# EAGLE board featherwing (EAGLE 6.5.0)
REV: C
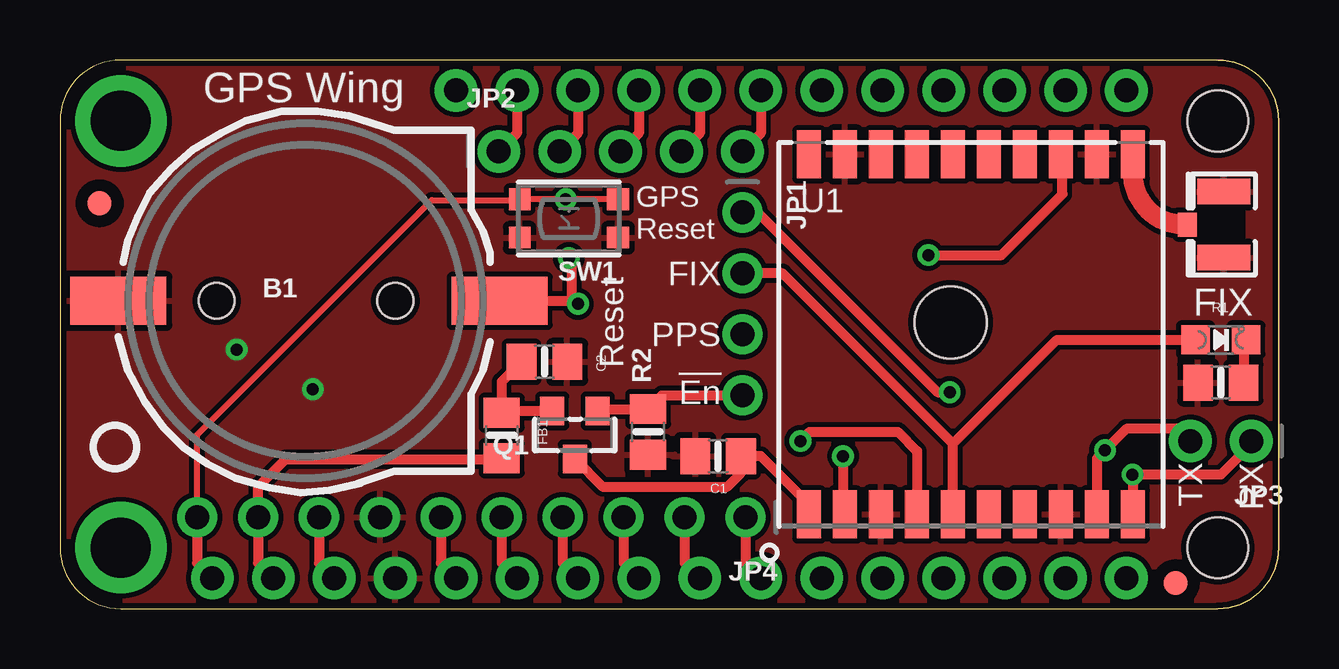
[diagram p0: board, top side]
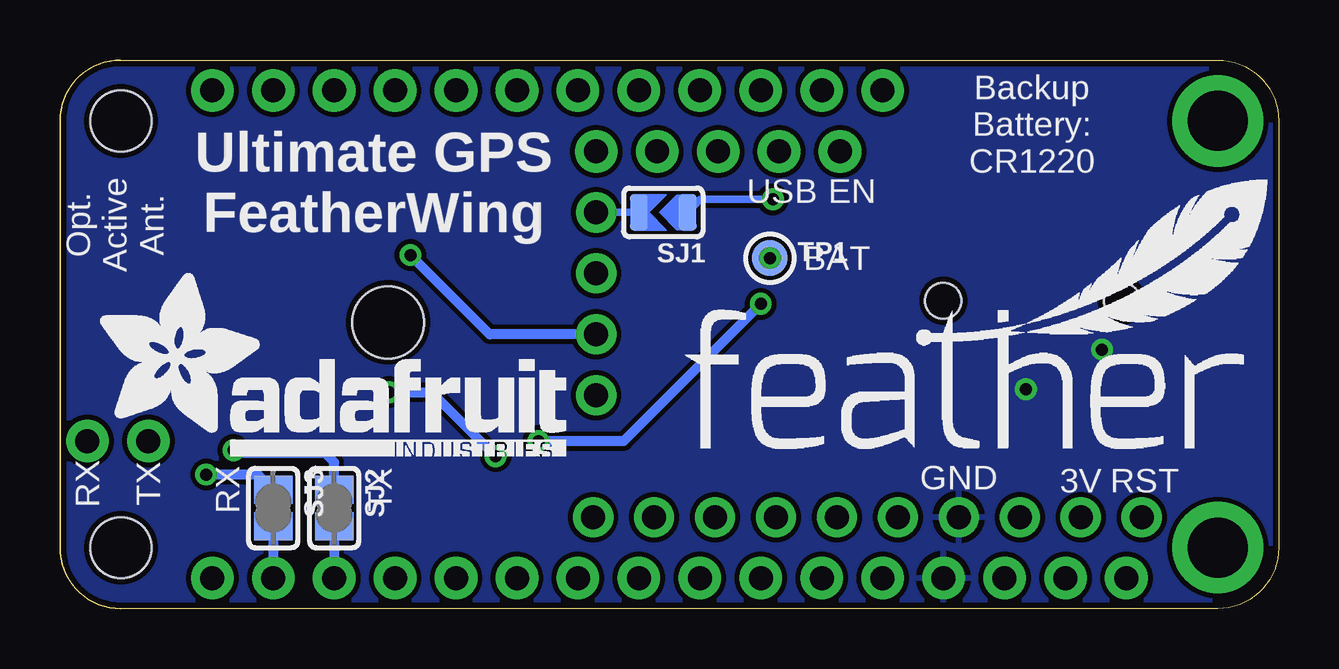
[diagram p1: board, bottom side, seen from below]

Size 50.8 x 22.86 mm. Coordinates in mm from the lower left corner, seen from the top.
Outline: 48.26,22.86 arc-90 50.8,20.32 50.8,2.54 arc-90 48.26,0
Copper layers (1*16): Top 0.035mm / dielectric 1.5mm / Bottom 0.035mm
Design rules "adafruit": minimum track width 8mil, minimum drill 15.5mil, track to track 8mil, track to pad 8mil, pad to pad 8mil, via to via 8mil, smd to smd 8mil, copper to edge 10mil, drill to drill 8mil, minimum pad ring 10mil, minimum via ring 8mil, stop-mask expansion 2mil, vias tented up to drill 20mil, thermal gap 10mil

## Footprints (pad centres in the part's own frame; a part is rotated, then mirrored left to right if it is on the bottom)
CR1220-2 = smd 4 x 2: + 8.29,0; - -7.6,0 | hole 1.5: 3.95,0; -3.5,0
0805-NO = smd 1.24 x 1.5: 1 -0.95,0; 2 0.95,0
FIDUCIAL_1MM = smd 1 x 1: 1 0,0
1X04_ROUND = drill 1 pad 1.676: 1 -3.81,0; 2 -1.27,0; 3 1.27,0; 4 3.81,0
1X05_ROUND_70 = drill 1 pad 1.778: 1 -5.08,0; 2 -2.54,0; 3 0,0; 4 2.54,0; 5 5.08,0
1X02_ROUND = drill 1 pad 1.778: 1 -1.27,0; 2 1.27,0
1X10_ROUND = drill 1 pad 1.676: 1 -11.43,0; 2 -8.89,0; 3 -6.35,0; 4 -3.81,0; 5 -1.27,0; 6 1.27,0; 7 3.81,0; 8 6.35,0; 9 8.89,0; 10 11.43,0
CHIPLED_0805_NOOUTLINE = smd 1.2 x 1.2: A 0,-1.05; C 0,1.05
FEATHERWING = drill 1 pad 1.778: 1 6.35,1.27; 2 8.89,1.27; 3 11.43,1.27; 4 13.97,1.27; 5 16.51,1.27; 6 19.05,1.27; 7 21.59,1.27; 8 24.13,1.27; 9 26.67,1.27; 10 29.21,1.27; 11 31.75,1.27; 12 34.29,1.27; 13 36.83,1.27; 14 39.37,1.27; 15 41.91,1.27; 16 44.45,1.27; 17 44.45,21.59; 18 41.91,21.59; 19 39.37,21.59; 20 36.83,21.59; 21 34.29,21.59; 22 31.75,21.59; 23 29.21,21.59; 24 26.67,21.59; 25 24.13,21.59; 26 21.59,21.59; 27 19.05,21.59; 28 16.51,21.59 | drill 2.5 pad 3.81: P$1 2.54,20.32; P$2 2.54,2.54 | hole 2.54: 48.26,20.32; 48.26,2.54
SOT23-WIDE = smd 1 x 1.2: 1 -0.95,-1; 2 0.95,-1; 3 0,1
SOLDERJUMPER_ARROW_NOPASTE = smd 0.762 x 1.524: 1 -1.016,0; 2 1.016,0
SOLDERJUMPER_CLOSEDWIRE = smd 1.168 x 1.6: 1 -0.762,0; 2 0.762,0 | smd 0.635 x 0.203: WIRE 0,0
BTN_KMR2_4.6X2.8 = smd 0.9 x 0.9: A 2.05,0.8; A' -2.05,0.8; B 2.05,-0.8; B' -2.05,-0.8
TESTPOINT_ROUND_1.5MM = smd 1.5 x 1.5: P$1 0,0
FGPMMOPA6H = smd 2 x 1: P$1 -7.5,6.75; P$2 -7.5,5.25; P$3 -7.5,3.75; P$4 -7.5,2.25; P$5 -7.5,0.75; P$6 -7.5,-0.75; P$7 -7.5,-2.25; P$8 -7.5,-3.75; P$9 -7.5,-5.25; P$10 -7.5,-6.75; P$11 7.5,-6.75; P$12 7.5,-5.25; P$13 7.5,-3.75; P$14 7.5,-2.25; P$15 7.5,-0.75; P$16 7.5,0.75; P$17 7.5,2.25; P$18 7.5,3.75; P$19 7.5,5.25; P$20 7.5,6.75 | hole 3: 0.5,0.85
U.FL = smd 2.2 x 1.05: 1 0,1.375; 2 0,-1.375 | smd 0.8 x 1: 3 1.525,0

## Placement (x,y rotation side)
B1  CR1220  [CR1220-2]  10.03,12.83 0 top
C1  0.1uF  [0805-NO]  27.43,6.35 180 top
C2  10uF  [0805-NO]  20.19,10.29 0 top
FB1  Ferrite  [0805-NO]  18.41,7.21 90 top
FID1  FIDUCIAL""  [FIDUCIAL_1MM]  1.65,16.89 0 top
FID2  FIDUCIAL""  [FIDUCIAL_1MM]  46.51,1.06 0 top
JP1  [1X04_ROUND]  28.45,12.7 270 top
JP2  [1X05_ROUND_70]  23.37,19.05 0 top
JP3  [1X02_ROUND]  48.39,6.99 180 top
JP4  [1X10_ROUND]  17.14,3.81 180 top
LED1  RED  [CHIPLED_0805_NOOUTLINE]  48.39,11.2 270 top
MS1  FEATHERWING  [FEATHERWING]  0,0 0 top
Q1  DMG3415U-7  [SOT23-WIDE]  21.46,7.24 180 top
R1  470 ohm  [0805-NO]  48.39,9.42 0 top
R2  100K  [0805-NO]  24.51,7.37 90 top
SJ1  [SOLDERJUMPER_ARROW_NOPASTE]  25.65,16.51 180 bottom
SJ2  [SOLDERJUMPER_CLOSEDWIRE]  39.37,4.19 270 bottom
SJ3  [SOLDERJUMPER_CLOSEDWIRE]  41.91,4.19 270 bottom
SW1  KMR2  [BTN_KMR2_4.6X2.8]  21.21,16.26 180 top
TP1  [TESTPOINT_ROUND_1.5MM]  21.21,14.61 0 bottom
U1  FGPMMOPA6H  [FGPMMOPA6H]  37.97,11.43 90 top
U$9  [PCBFEAT-REV-040]  2.29,6.73 0 top
U$10  [FEATHERLOGO]  24.77,6.6 0 bottom
U$11  [ADAFRUIT_TEXT_20MM]  49.28,6.35 0 bottom
X1  uFL  [U.FL]  48.51,16 180 top

## Library data of the parts
B1 C1 C2 FB1 JP1-JP4 LED1 MS1 Q1 R1 R2 SJ2 SJ3 SW1 TP1 U1 U$9-U$11 X1 = microbuilder
FID1 FID2 SJ1 = microbuilder; BOM: EXCLUDE

## Nets
1PPS: JP1.3 U1.P$13
3.3V: C2.1 FB1.2 Q1.2
3V: FB1.1 JP4.9 MS1.2
A: JP4.6 MS1.5
AREF: JP4.8 MS1.3
B: JP4.5 MS1.6
C: JP4.4 MS1.7
D: JP4.3 MS1.8
E: JP4.2 MS1.9
EN: JP2.1 MS1.27
ENABLE: JP1.4 Q1.1 R2.2
F: JP4.1 MS1.10
FIX: JP1.2 LED1.A U1.P$5
G: MS1.16
GND: B1.- C1.2 C2.2 JP4.7 MS1.4 R1.1 R2.1 SW1.A SW1.A' U1.P$3 U1.P$8 U1.P$12 U1.P$19 X1.1 X1.2
GPS_RESET: JP1.1 SJ1.2 U1.P$2
GPS_RX: JP3.1 SJ3.1 U1.P$10
GPS_TX: JP3.2 SJ2.1 U1.P$9
H: MS1.19
I: MS1.20
J: MS1.21
K: MS1.22
L: JP2.5 MS1.23
M: JP2.4 MS1.24
MISO: MS1.13
MOSI: MS1.12
N: JP2.3 MS1.25
N$2: LED1.C R1.2
N$4: U1.P$11 X1.3
N$15: C1.1 Q1.3 U1.P$1
RST: JP4.10 MS1.1 SJ1.1 SW1.B SW1.B'
RX: MS1.14 SJ2.2
SCK: MS1.11
SCL: MS1.18
SDA: MS1.17
TX: MS1.15 SJ3.2
USB: JP2.2 MS1.26
VBACKUP: B1.+ TP1.P$1 U1.P$4

## Tracks (layer width: path | path; a pad name or v marks a point on that pad's centre or on a via)
1PPS  (via drill 0.5)
  Top 0.406: v36.2,14.73 39.24,14.73 41.78,17.27 41.78,18.87 U1.P$13
  Bottom 0.406: JP1.3 32.89,11.43 v36.2,14.73
3.3V
  Top 0.406: Q1.2 18.49,8.24 FB1.2 18.41,9.46 C2.1
3V
  Top 0.406: MS1.2 8.26,1.91 JP4.9 8.26,5.08 9.4,6.22 18.37,6.22 FB1.1
A
  Top 0.406: JP4.6 15.88,1.91 MS1.5
AREF
  Top 0.406: JP4.8 10.79,1.91 MS1.3
B
  Top 0.406: JP4.5 18.41,1.91 MS1.6
C
  Top 0.406: JP4.4 20.95,1.91 MS1.7
D
  Top 0.406: JP4.3 23.5,1.91 MS1.8
E
  Top 0.406: JP4.2 26.04,1.91 MS1.9
EN
  Top 0.406: MS1.27 19.05,19.81 JP2.1
ENABLE
  Top 0.406: Q1.1 22.49,8.32 R2.2 25.09,8.89 JP1.4
F
  Top 0.406: JP4.1 28.57,1.91 MS1.10
FIX
  Top 0.406: U1.P$5 37.22,6.87 | 37.22,6.87 41.55,11.2 LED1.A | 37.22,6.87 30.12,13.97 JP1.2
GND  (via drill 0.5)
  other vias: 7.37,10.79 10.54,9.14
  pour Top: 0,22.86 0,0 50.8,0 50.8,22.86
  pour Bottom: 0,22.86 0,0 50.8,0 50.8,22.86
GPS_RESET  (via drill 0.5)
  Top 0.406: JP1.1 29.08,16.51 36.58,9.02 v37.08,9.02 | v32.64,6.35 32.64,4.01 U1.P$2
  Bottom 0.305: JP1.1 SJ1.2
  Bottom 0.406: v37.08,9.02 35.31,9.02 v32.64,6.35
GPS_RX  (via drill 0.5)
  Top 0.406: JP3.1 49.66,6.86 48.39,5.59 v44.7,5.59 44.72,5.1 U1.P$10
  Bottom 0.406: SJ3.1 42.55,5.59 v44.7,5.59
GPS_TX  (via drill 0.5)
  Top 0.406: JP3.2 46.61,7.49 44.45,7.49 43.62,6.67 v43.56,6.6 43.22,6.27 U1.P$9
  Bottom 0.406: SJ2.1 39.37,6.1 39.75,6.48 43.43,6.48 v43.56,6.6
L
  Top 0.406: MS1.23 29.21,19.81 JP2.5
M
  Top 0.406: MS1.24 26.67,19.81 JP2.4
N
  Top 0.406: MS1.25 24.13,19.81 JP2.3
N$2
  Top 0.406: LED1.C 49.34,10.72 R1.2
N$4
  Top 0.813: U1.P$11 44.72,18.01 arc90 X1.3
N$15
  Top 0.406: U1.P$1 31.11,4.04 31.11,4.45 29.21,6.35 C1.1 28.38,5.65 27.81,5.08 22.62,5.08 Q1.3
RST  (via drill 0.5)
  Top 0.254: SW1.B' v21.08,17.06 | 20.95,17.06 SW1.B 19.12,17.02 15.49,17.02 5.71,7.24 JP4.10
  Top 0.305: v21.08,17.06 20.95,17.06
  Top 0.406: JP4.10 5.71,1.91 MS1.1
  Bottom 0.305: SJ1.1 24.09,17.06 v21.08,17.06
RX
  Bottom 0.406: SJ2.2 MS1.14
TX
  Bottom 0.406: SJ3.2 MS1.15
USB
  Top 0.406: MS1.26 21.59,19.81 JP2.2
VBACKUP  (via drill 0.5)
  Top 0.406: B1.+ 21.34,12.83 | 21.34,12.83 21.46,12.83 v21.59,12.7 | v30.86,6.99 31.24,7.37 34.92,7.37 35.72,6.57 U1.P$4 | 21.34,12.83 21.34,14.48 TP1.P$1
  Bottom 0.406: v21.59,12.7 27.3,6.99 v30.86,6.99
  other vias: 21.21,14.61

## Text on the board
tPlace: GPS Wing | GPS / Reset | FIX | PPS | FIX | Reset | !En | TX | RX
bPlace: Backup / Battery: / CR1220 | Ultimate GPS / FeatherWing | EN | USB | Opt. / Active / Ant. | BAT | RST | 3V | GND | TX | RX | TX | RX